# EAGLE board BlinkyBall-B v5 (EAGLE 6.2)
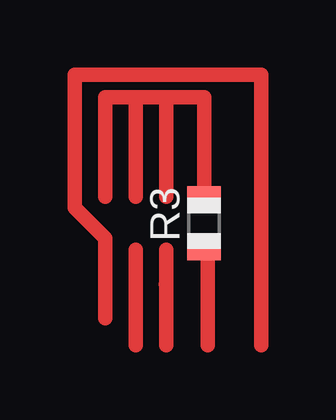
[diagram p0: board, top side]

No outline drawn. Coordinates in mm, seen from the top.
Copper layers (1*16): Top 0.035mm / dielectric 1.5mm / Bottom 0.035mm
Design rules: minimum track width 10mil, minimum drill 24mil, track to track 8mil, track to pad 8mil, pad to pad 8mil, via to via 8mil, smd to smd 8mil, copper to edge 40mil, drill to drill 8mil, minimum pad ring 10mil, minimum via ring 8mil, stop-mask expansion 4mil, vias tented up to drill 0mil, thermal gap 10mil

## Footprints (pad centres in the part's own frame; a part is rotated, then mirrored left to right if it is on the bottom)
R0805 = smd 1.1 x 1.4: 1 -1,0; 2 1,0

## Placement (x,y rotation side)
R3  [R0805]  13.49,9.37 90 top

## Library data of the parts
R3 = adafruit

## Nets
N$28: R3.1

## Tracks (layer width: path | path; a pad name or v marks a point on that pad's centre or on a via)
N$30
  Top 0.406: 11.9,6.71 11.9,6.83
  Top 0.61: 11.9,6.83 11.91,6.83
S$1
  Top 0.61: 9.37,10.48 9.37,14.61 10.64,14.61 | 10.64,14.61 10.64,10.48 | 10.64,14.61 11.91,14.61 | 11.91,14.61 11.91,10.48 | 11.91,14.61 13.49,14.61 13.49,10.95
S$2
  Top 0.61: 13.65,7.94 13.65,4.29
S$3
  Top 0.61: 11.91,8.26 11.91,4.29
S$5
  Top 0.61: 10.64,8.26 10.64,4.29
S$7
  Top 0.61: 9.37,8.26 9.37,5.4
S$9
  Top 0.61: 9.37,8.41 9.37,8.73 8.1,10 8.1,15.56 15.72,15.56
S$12
  Top 0.61: 15.88,15.56 15.88,4.29